# EAGLE board tb6612-breakout (EAGLE 7.5.0)
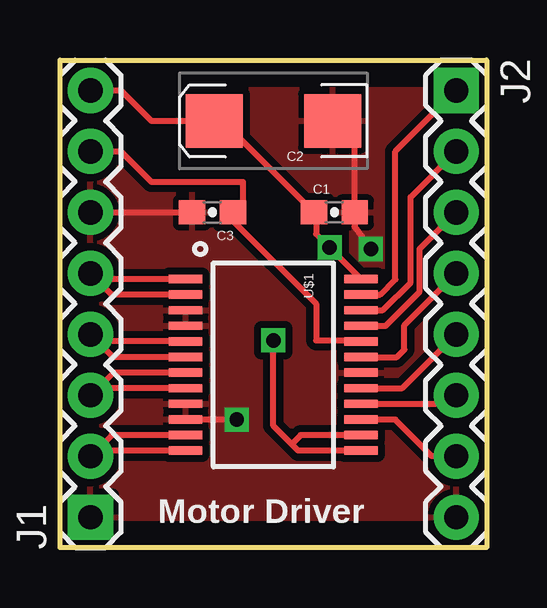
[diagram p0: board, top side]
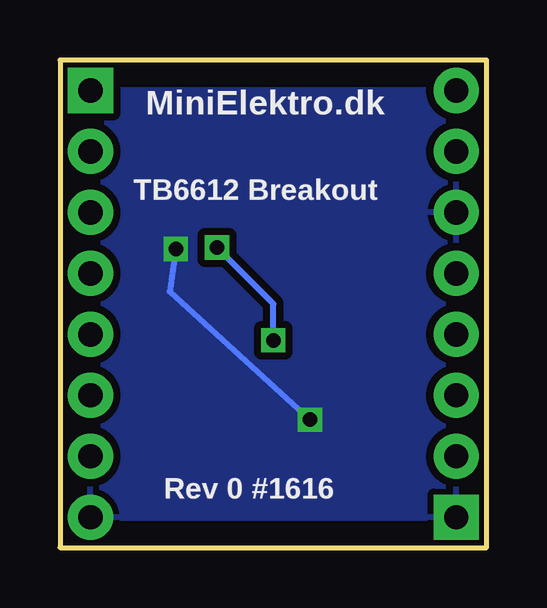
[diagram p1: board, bottom side, seen from below]

Size 17.78 x 20.32 mm. Coordinates in mm from the lower left corner, seen from the top.
Outline: 0,0 0,20.32 17.78,20.32 17.78,0 0,0
Copper layers (1*16): Top 0.035mm / dielectric 1.5mm / Bottom 0.035mm
Design rules "default": minimum track width 10mil, minimum drill 24mil, track to track 8mil, track to pad 8mil, pad to pad 8mil, via to via 8mil, smd to smd 8mil, copper to edge 40mil, drill to drill 8mil, minimum pad ring 10mil, minimum via ring 8mil, stop-mask expansion 4mil, vias tented up to drill 0mil, thermal gap 10mil

## Footprints (pad centres in the part's own frame; a part is rotated, then mirrored left to right if it is on the bottom)
0603-CAP = smd 1.1 x 1: 1 -0.85,0; 2 0.85,0
EIA6032-NOM = smd 2.37 x 2.23: A 2.47,0; C -2.47,0
1X08 = drill 1.016 pad 1.88 square: 1 0,0 | drill 1.016 pad 1.88: 2 2.54,0; 3 5.08,0; 4 7.62,0; 5 10.16,0; 6 12.7,0; 7 15.24,0; 8 17.78,0
SSOP24 = smd 0.348 x 1.397: 1 -3.575,-3.656; 2 -2.925,-3.656; 3 -2.275,-3.656; 4 -1.625,-3.656; 5 -0.975,-3.656; 6 -0.325,-3.656; 7 0.325,-3.656; 8 0.975,-3.656; 9 1.625,-3.656; 10 2.275,-3.656; 11 2.925,-3.656; 12 3.575,-3.656; 13 3.575,3.656; 14 2.925,3.656; 15 2.275,3.656; 16 1.625,3.656; 17 0.975,3.656; 18 0.325,3.656; 19 -0.325,3.656; 20 -0.975,3.656; 21 -1.625,3.656; 22 -2.275,3.656; 23 -2.925,3.656; 24 -3.575,3.656

## Placement (x,y rotation side)
C1  0.1uF  [0603-CAP]  11.43,13.97 0 top
C2  10UF-25V-10%(SMT-TANT)  [EIA6032-NOM]  8.89,17.78 180 top
C3  0.1uF  [0603-CAP]  6.35,13.97 180 top
J1  [1X08]  1.27,1.27 90 top
J2  [1X08]  16.51,19.05 270 top
U$1  TB6612FNG  [SSOP24]  8.89,7.62 270 top

## Library data of the parts
C1 C3 = SparkFun-Capacitors; PROD_ID: CAP-00810
C2 = SparkFun-Capacitors; PROD_ID: CAP-12984
J1 J2 = SparkFun-Connectors; PROD_ID: CONN-08438
U$1 = SparkFun-PowerIC; PROD_ID: IC-09363

## Nets
GND: C1.2 C2.C C3.2 J1.1 J1.6 J2.8 U$1.3 U$1.4 U$1.9 U$1.10 U$1.18
N$1: J2.1 U$1.23
N$2: J2.2 U$1.22
N$3: J2.3 U$1.21
N$4: J2.4 U$1.19
N$5: J2.5 U$1.17
N$6: J2.6 U$1.16
N$7: J2.7 U$1.15
N$8: J1.2 U$1.11 U$1.12
N$9: J1.3 U$1.7 U$1.8
N$10: J1.4 U$1.5 U$1.6
N$12: J1.5 U$1.1 U$1.2
N$13: C1.1 C2.A J1.8 U$1.13 U$1.14 U$1.24
VCC: C3.1 J1.7 U$1.20

## Tracks (layer width: path | path; a pad name or v marks a point on that pad's centre or on a via)
GND  (via drill 0.6)
  Top 0.254: C2.C 12.28,16.86 C1.2 12.28,13.37 v12.95,12.45 | J1.6 C3.2 | v7.37,5.33 5.25,5.33 U$1.10
  Bottom 0.254: v12.95,12.45 13.21,10.67 v7.37,5.33
  pour Top (isolate 0.305): 0,0 0,20.32 17.78,20.32 17.78,0
  pour Bottom (isolate 0.305): 0,0 0,20.32 17.78,20.32 17.78,0
N$1
  Top 0.254: U$1.23 13.34,10.54 13.97,11.18 13.97,16.51 J2.1
N$2
  Top 0.254: U$1.22 13.45,9.89 14.61,11.05 14.61,14.61 J2.2
N$3
  Top 0.254: U$1.21 13.56,9.24 14.99,10.67 14.99,12.45 J2.3
N$4
  Top 0.254: U$1.19 14.04,7.95 14.35,8.26 14.35,9.27 J2.4
N$5
  Top 0.254: U$1.17 14.27,6.64 J2.5
N$6
  Top 0.254: U$1.16 16.16,6 J2.6
N$7
  Top 0.254: J2.7 15.49,3.81 13.97,5.33 12.56,5.33 U$1.15
N$8
  Top 0.254: U$1.12 1.5,4.04 J1.2 2.15,4.7 U$1.11
N$9
  Top 0.254: U$1.8 1.56,6.64 J1.3 2.21,7.29 U$1.7
N$10
  Top 0.254: U$1.5 1.56,8.6 J1.4 2.21,7.95 U$1.6
N$12
  Top 0.254: U$1.2 2.15,10.54 J1.5 1.5,11.2 U$1.1
N$13  (via drill 0.6)
  Top 0.254: J1.8 2.54,19.05 3.81,17.78 C2.A 6.77,17.78 C1.1 10.67,13.88 10.67,13.07 v11.24,12.51 U$1.24 | U$1.13 9.93,4.04 9.65,4.32 | 9.65,4.32 8.89,5.08 v8.89,8.64 | U$1.14 10.03,4.7 9.65,4.32
  Bottom 0.254: v8.89,8.64 8.89,10.16 v11.24,12.51
VCC
  Top 0.254: J1.7 2.54,16.51 3.81,15.24 7.62,15.24 7.62,14.39 C3.1 7.2,13.63 10.67,10.16 10.67,8.64 12.51,8.64 U$1.20

## Text on the board
tPlace: Motor Driver
bPlace: MiniElektro.dk | TB6612 Breakout | Rev 0 #1616